# EAGLE board CT_schematic (EAGLE 7.6.0)

Size 100 x 80 mm. Coordinates in mm from the lower left corner, seen from the top.
Outline: 0,0 100,0 100,80 0,80 0,0
Copper layers (1*16): Top 0.035mm / dielectric 1.5mm / Bottom 0.035mm
Design rules "default": minimum track width 10mil, minimum drill 24mil, track to track 8mil, track to pad 8mil, pad to pad 8mil, via to via 8mil, smd to smd 8mil, copper to edge 40mil, drill to drill 8mil, minimum pad ring 10mil, minimum via ring 8mil, stop-mask expansion 4mil, vias tented up to drill 0mil, thermal gap 10mil

## Footprints (pad centres in the part's own frame; a part is rotated, then mirrored left to right if it is on the bottom)
C0603 = smd 0.8 x 0.8: 1 -0.762,0; 2 0.762,0
C0402 = smd 0.5 x 0.5: 1 -0.508,0; 2 0.508,0
C1210 = smd 1.2 x 2.5: 1 -1.524,0; 2 1.524,0
C1206 = smd 1.3 x 1.6: 1 -1.524,0; 2 1.524,0
L0603 = smd 0.8 x 0.8: 1 -0.762,0; 2 0.762,0
R0603 = smd 0.8 x 0.8: 1 -0.762,0; 2 0.762,0
UFQFPN32 = smd 0.6 x 0.3: 1 -2.35,1.75; 2 -2.35,1.25; 3 -2.35,0.75; 4 -2.35,0.25; 5 -2.35,-0.25; 6 -2.35,-0.75; 7 -2.35,-1.25; 8 -2.35,-1.75; 17 2.35,-1.75; 18 2.35,-1.25; 19 2.35,-0.75; 20 2.35,-0.25; 21 2.35,0.25; 22 2.35,0.75; 23 2.35,1.25; 24 2.35,1.75 | smd 0.3 x 0.6: 9 -1.75,-2.35; 10 -1.25,-2.35; 11 -0.75,-2.35; 12 -0.25,-2.35; 13 0.25,-2.35; 14 0.75,-2.35; 15 1.25,-2.35; 16 1.75,-2.35; 25 1.75,2.35; 26 1.25,2.35; 27 0.75,2.35; 28 0.25,2.35; 29 -0.25,2.35; 30 -0.75,2.35; 31 -1.25,2.35; 32 -1.75,2.35 | smd 3.45 x 3.45: EPAD 0,0
SOIC-8 = smd 1.6 x 0.6: 1 -2.7,1.905 | smd 1.55 x 0.6: 2 -2.7,0.635; 3 -2.7,-0.635; 4 -2.7,-1.905; 5 2.7,-1.905; 6 2.7,-0.635; 7 2.7,0.635; 8 2.7,1.905
TST-110-05-T-D-RA = drill 1 pad 1.7 square: 1 0,0 | drill 1 pad 1.7: 2 0,2.54; 3 2.54,0; 4 2.54,2.54; 5 5.08,0; 6 5.08,2.54; 7 7.62,0; 8 7.62,2.54; 9 10.16,0; 10 10.16,2.54; 11 12.7,0; 12 12.7,2.54; 13 15.24,0; 14 15.24,2.54; 15 17.78,0; 16 17.78,2.54; 17 20.32,0; 18 20.32,2.54; 19 22.86,0; 20 22.86,2.54
ABS07-32.768KHZ-7-T = smd 1.1 x 2.4: 1 -2.5,0; 2 0,0
ASFL1 = smd 1.7 x 1.5: 1 -1.27,-1.1; 2 1.27,-1.1; 3 1.27,1.1; 4 -1.27,1.1
SOIC-8_EP = smd 1.6 x 0.533: 1 -2.921,1.905; 2 -2.921,0.635; 3 -2.921,-0.635; 4 -2.921,-1.905; 5 2.921,-1.905; 6 2.921,-0.635; 7 2.921,0.635; 8 2.921,1.905 | smd 2.54 x 3.302: EPAD 0,0 | drill 0.406 pad 0.406: P$1 -0.508,0.635; P$2 0.381,0.635; P$3 -0.508,-0.635; P$4 0.381,-0.635
DFN8_2X3MC = smd 0.813 x 0.305: 1 -1.398,0.75; 2 -1.398,0.25; 3 -1.398,-0.25; 4 -1.398,-0.75; 5 1.398,-0.75; 6 1.398,-0.25; 7 1.398,0.25; 8 1.398,0.75 | smd 1.753 x 1.549: 9 0,0
JST-2-SMD = smd 1 x 4.6: 1 -1,-3.7; 2 1,-3.7 | smd 1.6 x 3.4: NC1 -3.4,1.5; NC2 3.4,1.5
FCI_10118193-0001LF = smd 0.4 x 1.35: 1 -1.3,2.675; 2 -0.65,2.675; 3 0,2.675; 4 0.65,2.675; 5 1.3,2.675 | smd 1.6 x 1.4: 6 -3.2,2.45; 7 3.2,2.45 | smd 1.9 x 1.9: 8 -1.2,0; 9 1.2,0 | hole 0.5: -3.3,0; 3.3,0
SON-6 = smd 0.55 x 0.3: 1 -0.355,0.5 | smd 0.52 x 0.3: 2 -0.37,0; 3 -0.37,-0.5; 4 0.37,-0.5; 5 0.37,0; 6 0.37,0.5
SW_4-1437565-2 = smd 1.4 x 2.1: 1 -2.23,4.55; 2 -2.23,-4.55; 3 2.23,4.55; 4 2.23,-4.55
LGM67K-G1J2-24-Z = smd 0.8 x 1.4: A -2,0; C 0,0
NC7SZ125M5X = smd 1.3 x 0.7: 1 -1.3,0.95; 2 -1.3,0; 3 -1.3,-0.95; 4 1.3,-0.95; 5 1.3,0.95

## Placement (x,y rotation side)
C1  1e-07  [C0603]  -33.02,52.07 0 top  (outside the outline)
C2  1e-07  [C0603]  -36.83,52.07 0 top  (outside the outline)
C3  1e-07  [C0603]  -40.64,52.07 0 top  (outside the outline)
C4  1e-07  [C0603]  -44.45,52.07 0 top  (outside the outline)
C5  4.7e-06  [C0603]  -29.21,52.07 0 top  (outside the outline)
C6  1e-08  [C0603]  -48.26,52.07 0 top  (outside the outline)
C7  1e-06  [C0603]  -52.07,52.07 0 top  (outside the outline)
C8  1e-11  [C0402]  -34.29,57.15 0 top  (outside the outline)
C9  1e-11  [C0402]  -38.1,57.15 0 top  (outside the outline)
C10  1e-08  [C0402]  -41.91,57.15 0 top  (outside the outline)
C11  1e-07  [C0402]  -45.72,57.15 0 top  (outside the outline)
C12  1e-08  [C0402]  -49.53,57.15 0 top  (outside the outline)
C13  1e-05  [C1210]  -57.15,33.02 0 top  (outside the outline)
C14  1e-05  [C1210]  -16.51,40.64 0 top  (outside the outline)
C15  1e-05  [C1210]  -22.86,40.64 0 top  (outside the outline)
C16  1e-05  [C1210]  -29.21,40.64 0 top  (outside the outline)
C17  1e-07  [C0402]  -53.34,57.15 0 top  (outside the outline)
C18  1e-05  [C1206]  -35.56,40.64 0 top  (outside the outline)
C19  1e-05  [C1206]  -41.91,40.64 0 top  (outside the outline)
C20  1e-08  [C0402]  -57.15,57.15 0 top  (outside the outline)
C21  1e-08  [C0402]  -60.96,57.15 0 top  (outside the outline)
F1  240.0  [L0603]  -55.88,52.07 0 top  (outside the outline)
R1  10000.0  [R0603]  -34.29,46.99 0 top  (outside the outline)
R2  1000.0  [R0603]  -59.69,52.07 0 top  (outside the outline)
R3  1600.5  [R0603]  -15.24,57.15 0 top  (outside the outline)
R4  4700.0  [R0603]  -19.05,57.15 0 top  (outside the outline)
R5  10000.0  [R0603]  -39.37,46.99 0 top  (outside the outline)
R6  10000.0  [R0603]  -44.45,46.99 0 top  (outside the outline)
R7  10000.0  [R0603]  -49.53,46.99 0 top  (outside the outline)
R8  10000.0  [R0603]  -54.61,46.99 0 top  (outside the outline)
R9  10000.0  [R0603]  -59.69,46.99 0 top  (outside the outline)
R10  4031.5447154472  [R0603]  -19.05,46.99 0 top  (outside the outline)
R11  2200.0  [R0603]  -22.86,57.15 0 top  (outside the outline)
R12  10000.0  [R0603]  -15.24,52.07 0 top  (outside the outline)
R13  10000.0  [R0603]  -20.32,52.07 0 top  (outside the outline)
R14  9100.0  [R0603]  -26.67,57.15 0 top  (outside the outline)
R15  680000.0  [R0603]  -24.13,46.99 0 top  (outside the outline)
R16  120000.0  [R0603]  -29.21,46.99 0 top  (outside the outline)
R17  2000.0  [R0603]  -30.48,57.15 0 top  (outside the outline)
R18  10000.0  [R0603]  -25.4,52.07 0 top  (outside the outline)
U1  STM32L011K3U6  [UFQFPN32]  -58.42,5.08 0 top  (outside the outline)
U2  AT25256B-SSHL-T  [SOIC-8]  -24.13,17.78 0 top  (outside the outline)
U3  TST-110-05-T-D-RA  [TST-110-05-T-D-RA]  -46.99,24.13 0 top  (outside the outline)
U4  ABS07-32.768KHZ-7-T  [ABS07-32.768KHZ-7-T]  -27.94,34.29 0 top  (outside the outline)
U5  ASFL1-12MHZ-NCS  [ASFL1]  -41.91,16.51 0 top  (outside the outline)
U6  MIC5234YME  [SOIC-8_EP]  -36.83,33.02 0 top  (outside the outline)
U7  MCP73831T-2ACI/MC  [DFN8_2X3MC]  -20.32,60.96 0 top  (outside the outline)
U8  S2B-PH-SM4-TB(LF)(SN)  [JST-2-SMD]  -41.91,6.35 0 top  (outside the outline)
U9  10118193-0001LF  [FCI_10118193-0001LF]  -50.8,16.51 0 top  (outside the outline)
U10  TPS3895ADRYR  [SON-6]  -13.97,60.96 0 top  (outside the outline)
U11  4-1437565-2  [SW_4-1437565-2]  -27.94,6.35 0 top  (outside the outline)
U12  Q65110A2395  [LGM67K-G1J2-24-Z]  -45.72,34.29 0 top  (outside the outline)
U13  nc7sz125m5x  [NC7SZ125M5X]  -46.99,40.64 0 top  (outside the outline)
U14  nc7sz125m5x  [NC7SZ125M5X]  -53.34,40.64 0 top  (outside the outline)

## Library data of the parts
C1-C21 F1 R1-R18 U1-U14 = circuit_tree

## Nets
CLK_CRYSTAL_U1_2: C8.1 U1.2 U4.1
CLK_CRYSTAL_U1_3: C9.1 U1.3 U4.2
CLK_U1_6: U1.6 U5.3
GND: C1.2 C2.2 C3.2 C4.2 C5.2 C6.2 C7.2 C8.2 C9.2 C10.2 C11.2 C12.2 C13.2 C14.2 C15.2 C16.2 C17.2 C18.2 C19.2 C20.2 C21.2 R2.2 R5.2 R11.2 R14.2 R16.2 R17.2 U1.EPAD U2.4 U3.4 U3.6 U3.8 U3.10 U3.12 U3.14 U3.16 U3.18 U3.20 U5.2 U6.7 U6.EPAD U7.6 U7.9 U8.2 U9.5 U9.6 U9.7 U9.8 U9.9 U10.2 U12.C U13.2 U13.3 U14.1 U14.3
INPUT_USBPOWER_5V: C18.1 R18.2 U7.1 U7.2 U9.1
NET_U1_4: R4.1 U1.4 U14.4
NET_U1_5: C6.1 C7.1 F1.1 U1.5
NET_U1_31: R3.1 R5.1 U1.31 U12.A
NET_U1_32: R1.1 U1.32 U11.3 U11.4
NET_U2_3: R6.1 U2.3
NET_U2_7: R8.1 U2.7
NET_U6_4: R10.2 R11.1 U6.4
NET_U7_5: R18.1 U7.5
NET_U7_8: R17.1 U7.8
NET_U10_1: R13.1 R14.1 U10.1
NET_U10_3: R15.2 R16.1 U10.3
NET_U10_4: R12.1 U10.4 U13.4 U14.2
NET_U11_1: R2.1 U11.1 U11.2
PROC_SPI1_MISO: U1.12 U2.2
PROC_SPI1_MOSI: U1.13 U2.5
PROC_SPI1_NSS: R7.1 U1.10 U2.1
PROC_SPI1_SCK: U1.11 U2.6
PROC_SYS_SWCLK: U1.24 U3.9
PROC_SYS_SWDIO: U1.23 U3.7
RST_OUT_U3_SRESET_B: R9.1 U3.15 U13.1
VCC_S1_3V7: C13.1 C14.1 C19.1 U6.5 U6.8 U7.3 U7.4 U8.1
VCC_TIER1_3V3: C1.1 C2.1 C3.1 C4.1 C5.1 C10.1 C11.1 C12.1 C15.1 C16.1 C17.1 C20.1 C21.1 F1.2 R1.2 R3.2 R4.2 R6.2 R7.2 R8.2 R9.2 R10.1 R12.2 R13.2 R15.1 U1.1 U1.17 U2.8 U3.1 U5.4 U6.1 U10.6 U13.5 U14.5

## Tracks (layer width: path | path; a pad name or v marks a point on that pad's centre or on a via)
CLK_CRYSTAL_U1_2  (2 unrouted)
CLK_CRYSTAL_U1_3  (2 unrouted)
CLK_U1_6  (1 unrouted)
GND  (54 unrouted)
INPUT_USBPOWER_5V  (4 unrouted)
NET_U1_4  (2 unrouted)
NET_U1_5  (3 unrouted)
NET_U1_31  (3 unrouted)
NET_U1_32  (3 unrouted)
NET_U2_3  (1 unrouted)
NET_U2_7  (1 unrouted)
NET_U6_4  (2 unrouted)
NET_U7_5  (1 unrouted)
NET_U7_8  (1 unrouted)
NET_U10_1  (2 unrouted)
NET_U10_3  (2 unrouted)
NET_U10_4  (3 unrouted)
NET_U11_1  (2 unrouted)
PROC_SPI1_MISO  (1 unrouted)
PROC_SPI1_MOSI  (1 unrouted)
PROC_SPI1_NSS  (2 unrouted)
PROC_SPI1_SCK  (1 unrouted)
PROC_SYS_SWCLK  (1 unrouted)
PROC_SYS_SWDIO  (1 unrouted)
RST_OUT_U3_SRESET_B  (2 unrouted)
VCC_S1_3V7  (7 unrouted)
VCC_TIER1_3V3  (33 unrouted)